# Altium PCB m2t7.PcbDoc (part 2 of 3)
Units mil, origin at the board's own origin, x right, y up, seen from the top; angles counter-clockwise.
Board outline 3925 x 3925 mil, 2 copper layers (TopLayer, BottomLayer); 79 components, 92 nets, 975 pads, 13 vias.
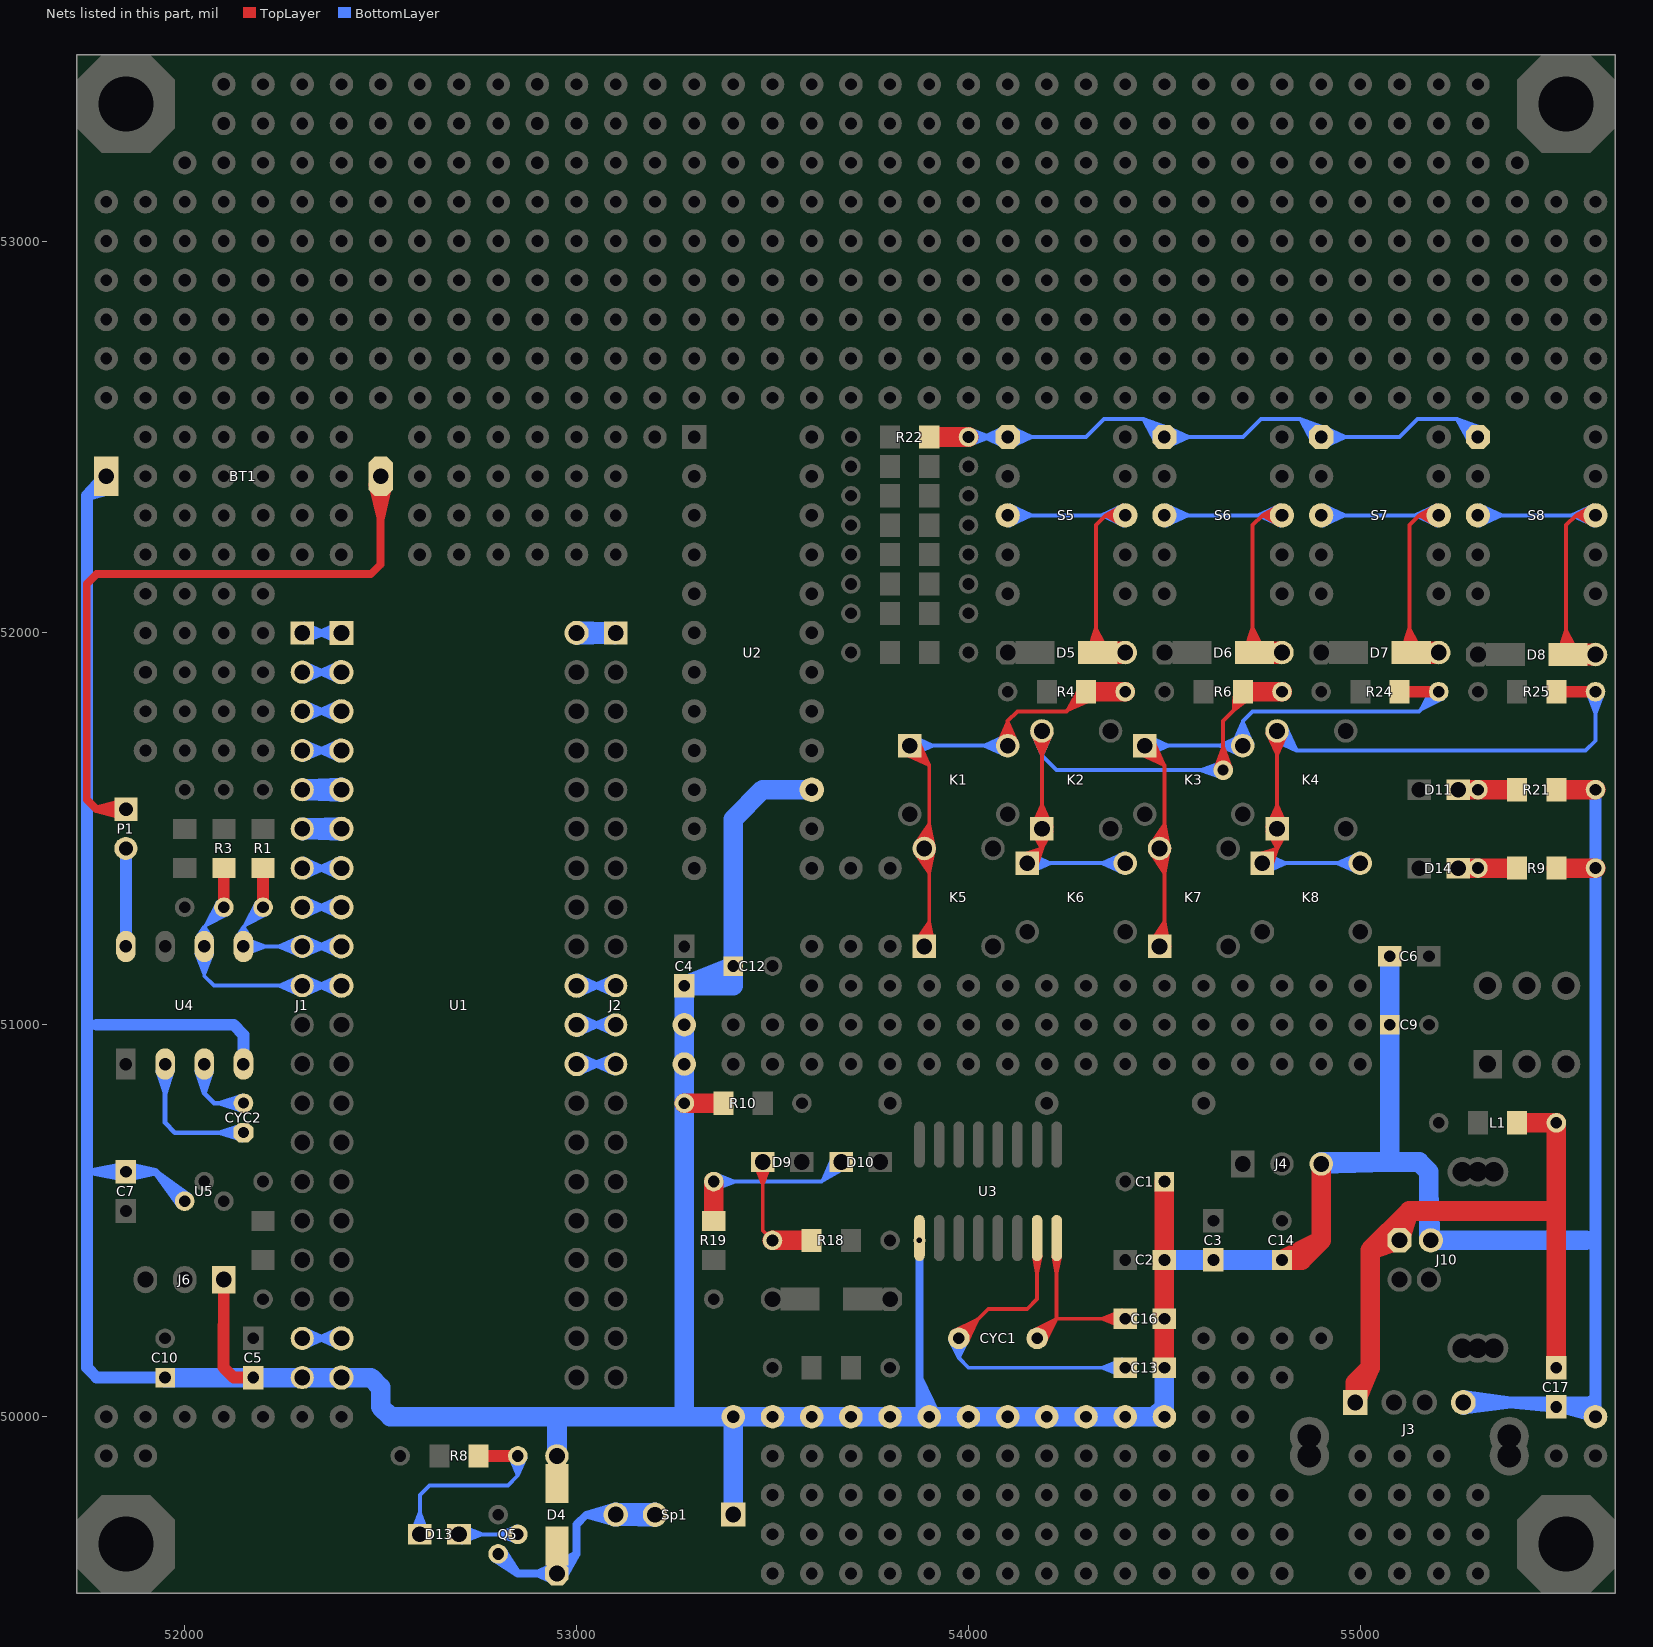
[diagram p2: the nets of this part, all layers, seen from the top]

## Via types
v1: diameter 50, hole 28, TopLayer to BottomLayer, 8 vias
v2: diameter 30, hole 14, TopLayer to BottomLayer, 5 vias

## Nets (pads, with @x,y where several pads share a name; then routed paths per layer and width w, separated by ;. In a path a pad name is that pad's centre, name@x,y a point inside that pad or via, vN(x,y) a via of type N, cw(c..) or ccw(c..) an arc to the next point about the centre after c; other vN are vias at no path point) (continued)
G: R22.2 R22.4 S5.1 S6.1 S7.1 S8.1 | length 4703.3
  TopLayer w50: R22.4@53900,52500 R22.2@54000,52500
  BottomLayer w10: R22.2@54000,52500 S5.1@54100,52500 ; R22.2@54000.91,52490.04 54055,52500 ; R22.2@54000.91,52509.96 54055,52500 ; R22.2@54003.64,52480.33 54055,52500 ; R22.2@54003.64,52519.67 54055,52500 ; S5.1@54092,52500 S5.1@54100,52500 ; S5.1@54094.46,52474.6 54039,52500 ; S5.1@54094.46,52525.4 54039,52500 ; S5.1@54097.9,52484.14 54039,52500 ; S5.1@54097.9,52515.86 54039,52500 ; S5.1@54099.7,52494.01 54039,52500 ; S5.1@54099.7,52505.99 54039,52500 ; S5.1@54100.3,52494.01 54161,52500 ; S5.1@54100.3,52505.99 54161,52500 ; S5.1@54102.1,52484.14 54161,52500 ; S5.1@54102.1,52515.86 54161,52500 ; S5.1@54105.54,52474.6 54161,52500 ; S5.1@54105.54,52525.4 54161,52500 ; S6.1@54479.8,52483.63 54446.02,52545.98 ; S6.1@54488.32,52489.07 54446.02,52545.98 ; S6.1@54495.92,52495.6 54446.02,52545.98 ; S6.1@54500.3,52494.01 54561,52500 ; S6.1@54500.3,52505.99 54561,52500 ; S6.1@54502.1,52484.14 54561,52500 ; S6.1@54502.1,52515.86 54561,52500 ; S6.1@54503.69,52504.73 54446.02,52545.98 ; S6.1@54505.54,52474.6 54561,52500 ; S6.1@54505.54,52525.4 54561,52500 ; S6.1@54508.93,52513.27 54446.02,52545.98 ; S6.1@54512.94,52522.55 54446.02,52545.98 ; S7.1@54879.8,52483.63 54846.02,52545.98 ; S7.1@54888.32,52489.07 54846.02,52545.98 ; S7.1@54895.92,52495.6 54846.02,52545.98 ; S7.1@54900.3,52494.01 54961,52500 ; S7.1@54900.3,52505.99 54961,52500 ; S7.1@54902.1,52484.14 54961,52500 ; S7.1@54902.1,52515.86 54961,52500 ; S7.1@54903.69,52504.73 54846.02,52545.98 ; S7.1@54905.54,52474.6 54961,52500 ; S7.1@54905.54,52525.4 54961,52500 ; S7.1@54908.93,52513.27 54846.02,52545.98 ; S7.1@54912.94,52522.55 54846.02,52545.98 ; S8.1@55279.8,52483.63 55246.02,52545.98 ; S8.1@55288.32,52489.07 55246.02,52545.98 ; S8.1@55295.92,52495.6 55246.02,52545.98 ; S8.1@55303.69,52504.73 55246.02,52545.98 ; S8.1@55308.93,52513.27 55246.02,52545.98 ; S8.1@55312.94,52522.55 55246.02,52545.98 ; S5.1@54100,52500 54300,52500 54346,52546 54446,52546 ; 54446,52546 54492,52500 S6.1@54500,52500 ; 54446.02,52545.98 S6.1@54500,52500 ; S6.1@54500,52500 54700,52500 54746,52546 54750,52546 54846,52546 ; 54846,52546 S7.1@54892,52500 ; 54846.02,52545.98 S7.1@54900,52500 ; S7.1@54892,52500 S7.1@54900,52500 ; S7.1@54892,52500 S7.1@54900,52500 ; S7.1@54900,52500 55100,52500 55146,52546 55150,52546 55246,52546 ; 55246,52546 55292,52500 S8.1@55300,52500 55246.02,52545.98
GND: BT1.1 C1.1 C2.2 C3.2 C4.2 C5.2 C6.2 C7.2 C9.1 C10.1 C12.1 C13.2 C14.1 C16.2 C17.2 D4.2 D4.4 J1.20 J3.4 J4.3 J6.1 J10.4 pad.0@53400,50000 pad.1@54100,50000 pad.6@54500,50000 pad.7@54400,50000 pad.8@54300,50000 pad.9@54200,50000 pad.29@53275,51000 pad.30@53275,50900 pad.32@53500,50000 pad.33@53600,50000 pad.34@53700,50000 pad.35@53800,50000 pad.36@53900,50000 pad.37@54000,50000 pad.45 R9.1 R9.3 R10.2 R10.4 R21.1 R21.3 Sp1.1 U1.20 U2.15 U3.1 U4.4 U5.1 | length 18897.2
  TopLayer w30: 52100,50125 52125,50100 ; C5.2@52150,50100 52125,50100 ; C5.2@52175,50100 52125,50100 ; 52099,50126 J6.1@52100,50350 52099,50126 ; 52099.44,50225 52100,50345 52099.44,50225
  TopLayer w50: R10.2@53275,50800 R10.4@53375,50800 ; C13.2@54500,50125 C16.2@54500,50250 C2.2@54500,50400 C1.1@54500,50600 ; J4.3@54900,50645 54900,50450 ; R9.3@55500,51400 R9.1@55600,51400 ; R21.3@55500,51600 R21.1@55600,51600 ; C14.1@54800,50400 54850,50400 ; C14.1@54800,50400 54900,50450 ; C14.1@54800,50400 54850,50400 ; 54850,50400 54900,50450
  BottomLayer w20: 51751,50625 C7.2@51850,50625 51925,50625 ; C7.2@51848.51,50609.07 51764,50625 C7.2@51848.51,50640.93 ; C7.2@51851.71,50609.09 51925,50625 ; C7.2@51851.71,50640.91 51925,50625 ; U5.1@51988.59,50540.26 51932.57,50617.43 U5.1@52009.74,50561.41 ; U5.1@52000,50550 51925,50625 ; J6.1@52100,50350 J6.1@52100,50375 ; pad.36@53875,50000 v2(53875,50450) ; pad.36@53880.23,49997 53875,50098.01 ; pad.36@53900,50000 53875,50098.01 ; pad.36@53918.8,50006.84 53875,50098.01
  BottomLayer w30: 51751,50625 51751,50675 ; 51775,51000 52125,51000 52150,50975 ; BT1.1@51789.83,52393.35 51751,52351 ; BT1.1@51800,52381 51751,52351 ; BT1.1@51800,52400 51751,52351 ; BT1.1@51806.37,52366.32 51751,52351 ; C10.1@51950,50100 51775,50100 51775,50101 51751,50125 51751,50600 51751,52351 ; U4.4@52150,50900 52150,50975 ; U4.4@52150,50915 52150,50975 ; J3.4@55262.8,50036.42 55586.42,50036.42 ; J3.4@55263.92,50019.96 55384.29,50036.42 J3.4@55263.92,50052.88 ; 55382.08,50036.42 C17.2@55500,50025 ; 55465.27,50036.42 pad.45@55600,50000 ; R21.1@55600,51600 R9.1@55600,51400 55600,50050 ; 55586.42,50036.42 55600,50050 ; 55586.42,50036.42 55500,50029 pad.45@55600,50000 ; 55586.42,50036.42 pad.45@55600,50000 ; 55586.42,50036.42 pad.45@55600,50000 ; 55586.42,50036.42 pad.45@55600,50000 ; pad.45@55600,50000 55600,50050
  BottomLayer w50: C10.1@51950,50100 52150,50100 J1.20@52300,50100 ; 51999,50100 C5.2@52175,50100 J1.20@52300,50100 ; 52875,50000 52950,50000 ; D4.2@52950,49900 52950,50000 ; C4.2@53275,51096 pad.29@53275,51000 ; pad.0@53375,50000 53275,50000 ; Sp1.1@53399.91,49750.33 53400,49931.33 ; Sp1.1@53400,49750.42 pad.0@53400,50000 ; pad.34@53720,50000 pad.36@53900,50000 pad.1@54080,50000 ; pad.8@54300,50000 pad.6@54480,50000 ; pad.8@54320,50000 pad.6@54500,50000 C13.2@54500,50125 54500,50025 54475,50000 pad.1@54100,50000 53875,50000 pad.0@53400,50000 ; C2.2@54500,50400 C3.2@54625,50400 ; C2.2@54504,50400 C3.2@54625,50400 ; C14.1@54800,50400 C3.2@54625,50400 ; C9.1@55075,51000 C6.2@55075,51175 C9.1@55075,51000 55075,50650 ; J10.4@55175,50450 55175,50575 ; 55575,50450 J10.4@55180,50450 55175,50575 ; J1.20@52300,50100 U1.20@52400,50100 52475,50100 52500,50075 52500,50025 52525,50000 52950,50000 ; 52950,50000 53000,50000 53275,50000 ; 53275,50000 pad.30@53275,50900 pad.29@53275,51000 ; 53275,50000 pad.0@53400,50000 ; 53275,50000 pad.0@53400,50000 ; pad.29@53275,51000 C4.2@53275,51100 ; C4.2@53275,51100 53400,51100 ; C4.2@53275,51100 C12.1@53400,51150 ; 53400,51100 C12.1@53400,51150 ; 53400,51100 C12.1@53400,51150 ; C12.1@53400,51150 53400,51525 53475,51600 ; 53475,51600 U2.15@53600,51600 53475,51600 ; 55075,50650 55150,50650 55175,50625 55175,50575 ; 55075,50650 54900,50650 J4.3@54900,50645 55075,50650
NetBT1_2: BT1.2 P1.1 | length 2079.1
  TopLayer w20: P1.1@51847.46,51530.64 51775,51550 ; P1.1@51847.46,51569.36 51775,51550 ; P1.1@51850,51550 51775,51550 ; BT1.2@52479.14,52378.58 52500,52290 ; BT1.2@52500,52381 52500,52290 ; BT1.2@52500,52400 52500,52175 52475,52150 51775,52150 51750,52125 51750,51575 51775,51550 ; BT1.2@52520.86,52378.58 52500,52290
NetC13_1: C13.1 CYC1.2 U3.7 | length 1770.3
  TopLayer w10: CYC1.2@53962.35,50218.36 54024.16,50248.78 ; CYC1.2@53967.45,50209.67 54024.16,50248.78 ; CYC1.2@53975.45,50200.07 54050.38,50275 54150,50275 54175,50300 U3.7@54175,50456 ; CYC1.2@53985.05,50192.07 54024.16,50248.78 ; CYC1.2@53993.74,50186.97 54024.16,50248.78 ; U3.7@54166.54,50409.67 54175,50367 ; U3.7@54175,50410.5 54175,50367 ; U3.7@54183.46,50409.67 54175,50367
  BottomLayer w10: CYC1.2@53953.51,50195.06 53975.45,50149.55 ; CYC1.2@53963.05,50198.52 53975.45,50149.55 ; CYC1.2@53975.45,50200.07 53975.45,50149.55 ; CYC1.2@53987.85,50198.52 53975.45,50149.55 ; CYC1.2@53997.39,50195.06 53975.45,50149.55 ; C13.1@54392.06,50104.37 54340,50125 ; C13.1@54392.06,50145.63 54340,50125 ; C13.1@54394.92,50114.05 54340,50125 ; C13.1@54394.92,50135.95 54340,50125 ; C13.1@54396,50125 54340,50125 ; C13.1@54400,50125 54000,50125 53975.45,50149.55
NetC16_1: C16.1 CYC1.1 U3.8 | length 1205.7
  TopLayer w10: CYC1.1@54162.29,50218.32 54223.87,50248.87 ; CYC1.1@54167.41,50209.64 54223.87,50248.87 ; CYC1.1@54185.09,50192.11 54223.87,50248.87 ; CYC1.1@54193.8,50187.05 54223.87,50248.87 ; U3.8@54216.54,50409.67 54225,50367 ; U3.8@54225,50410.5 54225,50367 ; U3.8@54225,50456 54225,50250 ; U3.8@54233.46,50409.67 54225,50367 ; C16.1@54392.06,50229.37 54340,50250 ; C16.1@54392.06,50270.63 54340,50250 ; C16.1@54394.92,50239.05 54340,50250 ; C16.1@54394.92,50260.95 54340,50250 ; C16.1@54396,50250 54340,50250 ; C16.1@54400,50250 54225,50250 ; 54223.87,50248.87 CYC1.1@54175.45,50200.07 54175.45,50200.45 54225,50250
NetC17_1: C17.1 J3.1 J10.1 L1.1 L1.3 | length 2126.9
  TopLayer w50: L1.3@55400,50750 L1.1@55500,50750 55500,50525 ; C17.1@55500,50125 55500,50525 ; C17.1@55500,50129 55500,50305 ; J3.1@54987.2,50036.42 54987.2,50087.2 ; J3.1@54987.2,50036.42 55025,50125 ; J3.1@54987.2,50036.42 54987.2,50087.2 ; 54987.2,50087.2 55025,50125 ; 55025,50125 55025,50425 ; 55025,50425 55125,50525 ; 55025,50425 J10.1@55100,50450 55125,50525 ; 55125,50525 55500,50525
NetCYC2_1: CYC2.1 U4.2 | length 934
  BottomLayer w12: U4.2@51931.23,50882.04 51950,50824 ; U4.2@51943.01,50884.6 51950,50824 ; U4.2@51950,50875.38 U4.2@51950,50900 51950,50750 51975,50725 CYC2.1@52150,50725 ; U4.2@51950,50885 51950,50824 ; U4.2@51956.99,50884.6 51950,50824 ; U4.2@51968.77,50882.04 51950,50824 ; CYC2.1@52147.04,50706.23 52089,50725 ; CYC2.1@52147.04,50743.77 52089,50725 ; CYC2.1@52149.6,50718.01 52089,50725 ; CYC2.1@52149.6,50731.99 52089,50725
NetCYC2_2: CYC2.2 U4.3 | length 729.4
  BottomLayer w12: U4.3@52031.24,50881.99 52050,50825 ; U4.3@52043.01,50884.59 52050,50825 ; U4.3@52050,50885 52050,50825 ; U4.3@52050,50900 52050,50825 ; U4.3@52056.99,50884.59 52050,50825 ; U4.3@52068.76,50881.99 52050,50825 ; CYC2.2@52147.04,50781.23 52089,50800 ; CYC2.2@52147.04,50818.77 52089,50800 ; CYC2.2@52149.6,50793.01 52089,50800 ; CYC2.2@52149.6,50806.99 52089,50800 ; CYC2.2@52150,50800 52075,50800 52050,50825
NetD4_1: D4.1 D4.3 Q5.3 Sp1.2 Sp1.3 | length 2412.9
  BottomLayer w20: Q5.3@52790.58,49638.33 52850,49600 ; Q5.3@52800,49650 52850,49600 ; Q5.3@52811.67,49659.42 52850,49600 ; D4.1@52938,49616 53000,49650 ; D4.1@52946,49580.4 52900,49600 ; D4.1@52946,49619.6 52900,49600 ; D4.1@52966,49588 53000,49650 ; Sp1.3@53096.88,49771.11 53025,49750 ; Sp1.3@53097.06,49729.53 53025,49750 ; Sp1.3@53102.26,49729.46 Sp1.2@53190.91,49750 ; Sp1.3@53102.41,49771.18 Sp1.2@53190.91,49750 ; Sp1.2@53193.26,49730.11 Sp1.3@53110.27,49769.3 ; Sp1.2@53193.39,49769.93 Sp1.3@53110.19,49731.3 ; Sp1.2@53197.51,49729.15 Sp1.3@53109,49750.3 ; Sp1.2@53197.58,49729.14 53109,49750 Sp1.2@53197.58,49770.86 ; Sp1.2@53197.65,49770.87 Sp1.3@53109,49750.3 ; Sp1.2@53201.9,49729.09 Sp1.3@53110.19,49731.3 ; Sp1.2@53202.04,49770.9 Sp1.3@53110.27,49769.3 ; 52850,49600 52900,49600 ; 52900,49600 D4.1@52950,49600 53000,49650 ; 53000,49650 53000,49725 53025,49750 ; 53025,49750 Sp1.2@53200,49750 ; 53025,49750 Sp1.3@53099.91,49750.33 Sp1.2@53190.91,49750 ; Sp1.3@53109,49750.3 Sp1.2@53200,49750 ; Sp1.3@53110.19,49731.3 Sp1.2@53200,49750 ; Sp1.3@53110.27,49769.3 Sp1.2@53200,49750
NetD5_2: D5.2 D5.4 S5.3 S5.8 | length 3549.8
  TopLayer w10: D5.4@54305.65,51952.92 54325,52011.42 ; D5.4@54315.48,51950.54 54325,52011.42 ; D5.4@54330,51950 54325,52011.42 ; D5.4@54344.17,51926.3 D5.2@54393.75,51925.79 ; D5.4@54344.17,51973.7 D5.2@54393.75,51974.21 ; D5.4@54344.24,51952.88 54325,52011.42 ; D5.4@54345.31,51936.42 D5.2@54393.75,51925.79 ; D5.4@54345.31,51963.58 D5.2@54393.75,51974.21 ; D5.4@54348.2,51935.65 D5.2@54397.75,51935.17 ; D5.4@54348.2,51964.35 D5.2@54397.75,51964.83 ; D5.4@54349.15,51925.51 D5.2@54397.75,51935.17 ; D5.4@54349.15,51974.49 D5.2@54397.75,51964.83 ; D5.4@54352.6,51935.63 D5.2@54400,51950 ; D5.4@54352.6,51964.37 D5.2@54400,51950 ; D5.4@54353.56,51956.82 54325,52011.42 ; D5.4@54356.55,51926.24 D5.2@54400,51950 ; D5.4@54356.55,51973.76 D5.2@54400,51950 ; D5.4@54356.81,51936.93 D5.2@54397.75,51964.83 ; D5.4@54356.81,51963.07 D5.2@54397.75,51935.17 ; D5.4@54359.34,51938.5 D5.2@54393.75,51974.21 ; D5.4@54359.34,51961.5 D5.2@54393.75,51925.79 ; D5.4@54363.38,51929.14 D5.2@54397.75,51964.83 ; D5.4@54363.38,51970.86 D5.2@54397.75,51935.17 ; D5.4@54367.37,51932.22 D5.2@54393.75,51974.21 ; D5.4@54367.37,51967.78 D5.2@54393.75,51925.79 ; S5.8@54393.24,52274.89 54350,52300 ; S5.8@54393.24,52325.11 54350,52300 ; S5.8@54397.44,52284.21 54350,52300 ; S5.8@54397.44,52315.79 54350,52300 ; S5.8@54399.64,52294.01 54350,52300 ; S5.8@54399.64,52305.99 54350,52300 ; S5.8@54400,52300 54350,52300 ; D5.4@54350,51950 54325,51975 54325,52275 54350,52300 ; D5.4@54350,51950 D5.2@54400,51950 ; D5.4@54350,51950 D5.2@54393.75,51925.79 ; D5.4@54350,51950 D5.2@54393.75,51974.21 ; D5.4@54350,51950 D5.2@54397.75,51935.17 ; D5.4@54350,51950 D5.2@54397.75,51964.83 ; D5.4@54350.47,51950 D5.2@54393.75,51925.79 ; D5.4@54350.47,51950 D5.2@54393.75,51974.21 ; D5.4@54350.47,51950 D5.2@54400,51950 ; D5.4@54350.47,51950 D5.2@54397.75,51935.17 ; D5.4@54350.47,51950 D5.2@54397.75,51964.83
  BottomLayer w10: S5.3@54100,52300 S5.8@54400,52300 ; S5.3@54100.3,52294.01 54161,52300 ; S5.3@54100.3,52305.99 54161,52300 ; S5.3@54102.1,52284.14 54161,52300 ; S5.3@54102.1,52315.86 54161,52300 ; S5.3@54105.54,52274.6 54161,52300 ; S5.3@54105.54,52325.4 54161,52300 ; S5.8@54394.46,52274.6 54339,52300 ; S5.8@54394.46,52325.4 54339,52300 ; S5.8@54397.9,52284.14 54339,52300 ; S5.8@54397.9,52315.86 54339,52300 ; S5.8@54399.7,52294.01 54339,52300 ; S5.8@54399.7,52305.99 54339,52300
NetD6_2: D6.2 D6.4 S6.3 S6.8 | length 3549.8
  TopLayer w10: D6.4@54705.65,51952.92 54725,52011.42 ; D6.4@54715.48,51950.54 54725,52011.42 ; D6.4@54730,51950 54725,52011.42 ; D6.4@54744.17,51926.3 D6.2@54793.75,51925.79 ; D6.4@54744.17,51973.7 D6.2@54793.75,51974.21 ; D6.4@54744.24,51952.88 54725,52011.42 ; D6.4@54745.31,51936.42 D6.2@54793.75,51925.79 ; D6.4@54745.31,51963.58 D6.2@54793.75,51974.21 ; D6.4@54748.2,51935.65 D6.2@54797.75,51935.17 ; D6.4@54748.2,51964.35 D6.2@54797.75,51964.83 ; D6.4@54749.15,51925.51 D6.2@54797.75,51935.17 ; D6.4@54749.15,51974.49 D6.2@54797.75,51964.83 ; D6.4@54752.6,51935.63 D6.2@54800,51950 ; D6.4@54752.6,51964.37 D6.2@54800,51950 ; D6.4@54753.56,51956.82 54725,52011.42 ; D6.4@54756.55,51926.24 D6.2@54800,51950 ; D6.4@54756.55,51973.76 D6.2@54800,51950 ; D6.4@54756.81,51936.93 D6.2@54797.75,51964.83 ; D6.4@54756.81,51963.07 D6.2@54797.75,51935.17 ; D6.4@54759.34,51938.5 D6.2@54793.75,51974.21 ; D6.4@54759.34,51961.5 D6.2@54793.75,51925.79 ; D6.4@54763.38,51929.14 D6.2@54797.75,51964.83 ; D6.4@54763.38,51970.86 D6.2@54797.75,51935.17 ; D6.4@54767.37,51932.22 D6.2@54793.75,51974.21 ; D6.4@54767.37,51967.78 D6.2@54793.75,51925.79 ; S6.8@54793.24,52274.89 54750,52300 ; S6.8@54793.24,52325.11 54750,52300 ; S6.8@54797.44,52284.21 54750,52300 ; S6.8@54797.44,52315.79 54750,52300 ; S6.8@54799.64,52294.01 54750,52300 ; S6.8@54799.64,52305.99 54750,52300 ; S6.8@54800,52300 54750,52300 ; D6.4@54750,51950 54725,51975 54725,52275 54750,52300 ; D6.4@54750,51950 D6.2@54800,51950 ; D6.4@54750,51950 D6.2@54793.75,51925.79 ; D6.4@54750,51950 D6.2@54793.75,51974.21 ; D6.4@54750,51950 D6.2@54797.75,51935.17 ; D6.4@54750,51950 D6.2@54797.75,51964.83 ; D6.4@54750.47,51950 D6.2@54793.75,51925.79 ; D6.4@54750.47,51950 D6.2@54793.75,51974.21 ; D6.4@54750.47,51950 D6.2@54800,51950 ; D6.4@54750.47,51950 D6.2@54797.75,51935.17 ; D6.4@54750.47,51950 D6.2@54797.75,51964.83
  BottomLayer w10: S6.3@54500,52300 S6.8@54800,52300 ; S6.3@54500.3,52294.01 54561,52300 ; S6.3@54500.3,52305.99 54561,52300 ; S6.3@54502.1,52284.14 54561,52300 ; S6.3@54502.1,52315.86 54561,52300 ; S6.3@54505.54,52274.6 54561,52300 ; S6.3@54505.54,52325.4 54561,52300 ; S6.8@54794.46,52274.6 54739,52300 ; S6.8@54794.46,52325.4 54739,52300 ; S6.8@54797.9,52284.14 54739,52300 ; S6.8@54797.9,52315.86 54739,52300 ; S6.8@54799.7,52294.01 54739,52300 ; S6.8@54799.7,52305.99 54739,52300
NetD7_2: D7.2 D7.4 S7.3 S7.8 | length 4581.8
  TopLayer w10: D7.4@55105.65,51952.92 55125,52011.42 ; D7.4@55115.48,51950.54 55125,52011.42 ; D7.4@55130,51950 55125,52011.42 ; D7.4@55144.17,51926.3 D7.2@55193.75,51925.79 ; D7.4@55144.17,51973.7 D7.2@55193.75,51974.21 ; D7.4@55144.24,51952.88 55125,52011.42 ; D7.4@55145.31,51936.42 D7.2@55193.75,51925.79 ; D7.4@55145.31,51963.58 D7.2@55193.75,51974.21 ; D7.4@55148.2,51935.65 D7.2@55197.75,51935.17 ; D7.4@55148.2,51964.35 D7.2@55197.75,51964.83 ; D7.4@55149.15,51925.51 D7.2@55197.75,51935.17 ; D7.4@55149.15,51974.49 D7.2@55197.75,51964.83 ; D7.4@55152.6,51935.63 D7.2@55200,51950 ; D7.4@55152.6,51964.37 D7.2@55200,51950 ; D7.4@55153.56,51956.82 55125,52011.42 ; D7.4@55156.55,51926.24 D7.2@55200,51950 ; D7.4@55156.55,51973.76 D7.2@55200,51950 ; D7.4@55156.81,51936.93 D7.2@55197.75,51964.83 ; D7.4@55156.81,51963.07 D7.2@55197.75,51935.17 ; D7.4@55159.34,51938.5 D7.2@55193.75,51974.21 ; D7.4@55159.34,51961.5 D7.2@55193.75,51925.79 ; D7.4@55163.38,51929.14 D7.2@55197.75,51964.83 ; D7.4@55163.38,51970.86 D7.2@55197.75,51935.17 ; D7.4@55167.37,51932.22 D7.2@55193.75,51974.21 ; D7.4@55167.37,51967.78 D7.2@55193.75,51925.79 ; S7.8@55193.24,52274.89 55150,52300 ; S7.8@55193.24,52325.11 55150,52300 ; S7.8@55197.44,52284.21 55150,52300 ; S7.8@55197.44,52315.79 55150,52300 ; S7.8@55199.64,52294.01 55150,52300 ; S7.8@55199.64,52305.99 55150,52300 ; S7.8@55200,52300 55150,52300 ; D7.4@55150,51950 55125,51975 55125,52275 55150,52300 ; D7.4@55150,51950 D7.2@55200,51950 ; D7.4@55150,51950 D7.2@55193.75,51925.79 ; D7.4@55150,51950 D7.2@55193.75,51974.21 ; D7.4@55150,51950 D7.2@55197.75,51935.17 ; D7.4@55150,51950 D7.2@55197.75,51964.83 ; D7.4@55150.47,51950 D7.2@55193.75,51925.79 ; D7.4@55150.47,51950 D7.2@55193.75,51974.21 ; D7.4@55150.47,51950 D7.2@55200,51950 ; D7.4@55150.47,51950 D7.2@55197.75,51935.17 ; D7.4@55150.47,51950 D7.2@55197.75,51964.83
  BottomLayer w10: 54961,52300 54905.54,52325.4 54961,52300 ; 54961,52300 54905.54,52274.6 54961,52300 ; 54961,52300 54902.1,52315.86 54961,52300 ; 54961,52300 54902.1,52284.14 54961,52300 ; 54961,52300 54900.3,52305.99 54961,52300 ; 54961,52300 54900.3,52294.01 54961,52300 ; 55139,52300 55194.46,52274.6 55139,52300 ; 55139,52300 55194.46,52325.4 55139,52300 ; 55139,52300 55197.9,52284.14 55139,52300 ; 55139,52300 55197.9,52315.86 55139,52300 ; 55139,52300 55199.7,52294.01 55139,52300 ; 55139,52300 55199.7,52305.99 55139,52300 ; S7.3@54900,52300 S7.8@55200,52300 S7.3@54900,52300
NetD8_2: D8.2 D8.4 S8.3 S8.8 | length 4146.5
  TopLayer w10: D8.4@55505.66,51947.99 55525,52004.88 ; D8.4@55515.48,51945.55 55525,52004.88 ; D8.4@55544.22,51921.28 D8.2@55591.4,51921.52 ; D8.4@55544.22,51947.95 55525,52004.88 ; D8.4@55544.23,51968.72 D8.2@55596.22,51969.71 ; D8.4@55545.27,51931.44 D8.2@55591.4,51921.52 ; D8.4@55545.42,51958.62 D8.2@55596.22,51969.71 ; D8.4@55548.22,51930.65 D8.2@55596.3,51930.46 ; D8.4@55548.23,51959.35 D8.2@55599.25,51959.98 ; D8.4@55549.12,51969.49 D8.2@55599.25,51959.98 ; D8.4@55549.27,51920.5 D8.2@55596.3,51930.46 ; D8.4@55551.14,51959.51 D8.2@55600,51950 ; D8.4@55552.6,51930.63 D8.2@55600,51945 ; D8.4@55552.6,51959.37 D8.2@55600,51945 ; D8.4@55553.51,51951.99 55525,52004.88 ; D8.4@55554.03,51930.91 D8.2@55600,51950 ; D8.4@55554.1,51969.26 D8.2@55600,51950 ; D8.4@55556.55,51921.24 D8.2@55600,51945 ; D8.4@55556.55,51968.76 D8.2@55600,51945 ; D8.4@55556.67,51931.86 D8.2@55599.25,51959.98 ; D8.4@55556.91,51958.02 D8.2@55596.3,51930.46 ; D8.4@55558.87,51921.96 D8.2@55600,51950 ; D8.4@55559.09,51933.31 D8.2@55596.22,51969.71 ; D8.4@55559.55,51956.34 D8.2@55591.4,51921.52 ; D8.4@55563.1,51923.97 D8.2@55599.25,51959.98 ; D8.4@55563.61,51965.71 D8.2@55596.3,51930.46 ; D8.4@55566.89,51926.78 D8.2@55596.22,51969.71 ; D8.4@55567.79,51962.37 D8.2@55591.4,51921.52 ; S8.8@55593.24,52274.89 55550,52300 ; S8.8@55593.24,52325.11 55550,52300 ; S8.8@55597.44,52284.21 55550,52300 ; S8.8@55597.44,52315.79 55550,52300 ; S8.8@55599.64,52294.01 55550,52300 ; S8.8@55599.64,52305.99 55550,52300 ; S8.8@55600,52300 55550,52300 ; 55525,51975 D8.4@55550,51950 ; 55525,51975 55525,52275 55550,52300 ; 55525,51975 55506.23,51951.07 55525,51975 ; 55525,51975 55550.51,51958.45 55525,51975 ; 55525,51975 55515.51,51946.1 55525,51975 ; 55525,51975 55543.34,51950.74 55525,51975 ; 55525,51975 D8.4@55530,51945 ; 55525,51975 D8.4@55530,51945 ; 55525,52004.88 D8.4@55530,51945 ; D8.4@55550,51950 D8.2@55600,51950 ; D8.4@55550,51950 D8.2@55591.4,51921.52 ; D8.4@55550,51950 D8.2@55596.22,51969.71 ; D8.4@55550,51950 D8.2@55596.3,51930.46 ; D8.4@55550,51950 D8.2@55599.25,51959.98 ; D8.4@55550,51950 D8.2@55600,51945 ; D8.4@55550.47,51945 D8.2@55591.4,51921.52 ; D8.4@55550.47,51945 D8.2@55600,51950 ; D8.4@55550.47,51945 D8.2@55596.22,51969.71 ; D8.4@55550.47,51945 D8.2@55596.3,51930.46 ; D8.4@55550.47,51945 D8.2@55599.25,51959.98 ; D8.4@55550.47,51945 D8.2@55600,51945
  BottomLayer w10: S8.3@55300,52300 S8.8@55600,52300 ; S8.3@55300.3,52294.01 55361,52300 ; S8.3@55300.3,52305.99 55361,52300 ; S8.3@55302.1,52284.14 55361,52300 ; S8.3@55302.1,52315.86 55361,52300 ; S8.3@55305.54,52274.6 55361,52300 ; S8.3@55305.54,52325.4 55361,52300 ; S8.8@55594.46,52274.6 55539,52300 ; S8.8@55594.46,52325.4 55539,52300 ; S8.8@55597.9,52284.14 55539,52300 ; S8.8@55597.9,52315.86 55539,52300 ; S8.8@55599.7,52294.01 55539,52300 ; S8.8@55599.7,52305.99 55539,52300
NetD9_2: D9.2 R18.2 R18.4 | length 534.4
  TopLayer w10: D9.2@53454.37,50646.06 53475,50594 ; D9.2@53464.05,50648.92 53475,50594 ; D9.2@53475,50650 53475,50475 R18.2@53500,50450 ; D9.2@53485.95,50648.92 53475,50594 ; D9.2@53495.63,50646.06 53475,50594
  TopLayer w50: R18.2@53500,50450 R18.4@53600,50450
NetD10_2: D10.2 R19.2 R19.4 | length 985.7
  TopLayer w50: R19.4@53350,50500 R19.2@53350,50600
  BottomLayer w10: R19.2@53350,50600 53625,50600 D10.2@53675,50650 ; R19.2@53350.91,50590.04 53405,50600 ; R19.2@53350.91,50609.96 53405,50600 ; R19.2@53353.64,50580.33 53405,50600 ; R19.2@53353.64,50619.67 53405,50600 ; D10.2@53653.39,50661.45 53627.79,50602.79 ; D10.2@53662.28,50656.7 53627.79,50602.79 ; D10.2@53671,50650 53627.79,50602.79 ; D10.2@53678.45,50641.9 53627.79,50602.79 ; D10.2@53683.96,50633.47 53627.79,50602.79
NetD11_2: D11.2 R21.2 R21.4 | length 388
  TopLayer w30: D11.2@55250,51600 R21.2@55300,51600 D11.2@55254,51600
  TopLayer w50: D11.2@55254,51600 R21.4@55400,51600 R21.2@55300,51600 D11.2@55254,51600
NetD13_1: D13.1 Q5.2 | length 650
  BottomLayer w10: D13.1@52700,49700 Q5.2@52850,49700 ; D13.1@52704,49700 52760,49700 ; D13.1@52705.08,49689.05 52760,49700 ; D13.1@52705.08,49710.95 52760,49700 ; D13.1@52707.94,49679.37 52760,49700 ; D13.1@52707.94,49720.63 52760,49700 ; Q5.2@52846.36,49680.33 52795,49700 ; Q5.2@52846.36,49719.67 52795,49700 ; Q5.2@52849.09,49690.04 52795,49700 ; Q5.2@52849.09,49709.96 52795,49700
NetD13_2: D13.2 R8.1 R8.3 | length 944.7
  TopLayer w30: R8.3@52750,49900 R8.1@52850,49900
  BottomLayer w10: D13.2@52579.37,49703.94 52600,49756 ; D13.2@52589.05,49701.08 52600,49756 ; D13.2@52600,49700 52600,49800 52625,49825 52825,49825 52850,49850 ; D13.2@52610.95,49701.08 52600,49756 ; D13.2@52620.63,49703.94 52600,49756 ; R8.1@52830.4,49896 52850,49850 ; R8.1@52840.05,49899 52850,49850 ; R8.1@52850,49900 52850,49850 ; R8.1@52859.95,49899 52850,49850 ; R8.1@52869.6,49896 52850,49850
NetD14_2: D14.2 R9.2 R9.4 | length 3374
  TopLayer w50: D14.2@55254,51400 R9.4@55400,51400 R9.2@55300,51400 D14.2@55254,51400
  BottomLayer w10: R9.2@55287.37,51415.51 D14.2@55259.18,51379.65 ; R9.2@55287.47,51384.42 D14.2@55258.55,51420.5 ; R9.2@55287.43,51384.44 D14.2@55258.79,51420.45 ; R9.2@55287.43,51415.56 D14.2@55258.79,51379.55 ; R9.2@55291.12,51417.92 D14.2@55255.5,51389.1 ; R9.2@55291.14,51417.93 D14.2@55255.32,51389.08 ; R9.2@55294.62,51391.57 D14.2@55258.55,51420.5 ; R9.2@55294.61,51391.58 D14.2@55258.79,51420.45 ; R9.2@55295.81,51380.44 D14.2@55249,51400.69 ; R9.2@55296,51380.4 D14.2@55250,51400 ; R9.2@55296,51419.6 D14.2@55250,51400 ; R9.2@55296.34,51419.66 D14.2@55249,51400.69 ; R9.2@55299,51390.05 D14.2@55250,51400 ; R9.2@55299,51409.95 D14.2@55250,51400 ; R9.2@55299.15,51409.96 D14.2@55249,51400.69 ; D14.2@55249,51400.69 R9.2@55299.31,51400.69 ; D14.2@55249,51400.69 R9.2@55298.89,51390.06 ; D14.2@55249,51400.69 R9.2@55300,51400 ; D14.2@55250,51400 R9.2@55300,51400 ; D14.2@55254,51400 R9.2@55300,51400 ; D14.2@55254,51400 R9.2@55299.31,51400.69 ; D14.2@55254,51400 55295.65,51380.48 D14.2@55254,51400 ; D14.2@55254,51400 55295.65,51419.52 D14.2@55254,51400 ; D14.2@55254,51400 R9.2@55298.91,51390.06 ; D14.2@55254,51400 55298.91,51409.94 D14.2@55254,51400 ; D14.2@55254,51400 R9.2@55298.91,51390.06 ; D14.2@55254,51400 R9.2@55300,51400 ; D14.2@55255.17,51410.94 R9.2@55299.31,51400.69 ; D14.2@55255.17,51410.94 55291.16,51382.06 D14.2@55255.32,51410.92 ; D14.2@55255.17,51410.94 55300.42,51420 D14.2@55255.32,51410.92 ; D14.2@55255.17,51410.94 55296.59,51390.6 D14.2@55255.32,51410.92 ; D14.2@55255.17,51410.94 55301.3,51409.91 D14.2@55255.32,51410.92 ; D14.2@55255.17,51410.94 R9.2@55300,51400 ; D14.2@55255.32,51389.08 R9.2@55300,51400 ; D14.2@55255.32,51389.08 55300.41,51380 D14.2@55255.5,51389.1 ; D14.2@55255.32,51389.08 55301.3,51390.09 D14.2@55255.5,51389.1 ; D14.2@55255.32,51389.08 55296.58,51409.4 D14.2@55255.5,51389.1 ; D14.2@55255.32,51410.92 R9.2@55300,51400 ; D14.2@55255.5,51389.1 R9.2@55299.31,51400.69 ; D14.2@55255.5,51389.1 R9.2@55300,51400 ; D14.2@55258.55,51420.5 R9.2@55299.31,51400.69 ; D14.2@55258.55,51420.5 55304.78,51419.42 D14.2@55258.79,51420.45 ; D14.2@55258.55,51420.5 55303.44,51409.39 D14.2@55258.79,51420.45 ; D14.2@55258.55,51420.5 R9.2@55300,51400 ; D14.2@55258.79,51379.55 R9.2@55300,51400 ; D14.2@55258.79,51379.55 55304.78,51380.58 D14.2@55259.18,51379.65 ; D14.2@55258.79,51379.55 55303.44,51390.61 D14.2@55259.18,51379.65 ; D14.2@55258.79,51379.55 55294.61,51408.42 D14.2@55259.18,51379.65 ; D14.2@55258.79,51420.45 R9.2@55300,51400 ; D14.2@55259.18,51379.65 R9.2@55299.31,51400.69 ; D14.2@55259.18,51379.65 R9.2@55300,51400 ; R9.2@55299.31,51400.69 R9.2@55300,51400
NetJ1_19: J1.19 U1.19 | length 704.1
  BottomLayer w10: J1.19@52300,50200 U1.19@52400,50200 ; J1.19@52301.77,50185.58 52359.53,50200 ; J1.19@52301.77,50214.42 52359.53,50200 ; J1.19@52305.05,50176 52359.53,50200 ; J1.19@52305.05,50224 52359.53,50200 ; U1.19@52394.46,50174.6 52339,50200 ; U1.19@52394.46,50225.4 52339,50200 ; U1.19@52397.9,50184.14 52339,50200 ; U1.19@52397.9,50215.86 52339,50200 ; U1.19@52399.7,50194.01 52339,50200 ; U1.19@52399.7,50205.99 52339,50200
NetJ2_1: J2.1 U1.40 | length 1011.1
  BottomLayer w20: U1.40@52998.34,51979.07 J2.1@53089.96,51982.35 ; U1.40@52998.34,52020.93 J2.1@53089.96,52017.65 ; U1.40@53002.42,51979.14 53091,52000 U1.40@53002.42,52020.86 ; U1.40@53006.38,51979.99 J2.1@53089.96,52017.65 ; U1.40@53006.38,52020.01 J2.1@53089.96,51982.35 ; J2.1@53097.87,51980.59 53010.47,52000 J2.1@53097.87,52019.41 ; J2.1@53100,52000 U1.40@53000,52000 ; U1.40@53000,52000 J2.1@53089.96,51982.35 ; U1.40@53000,52000 J2.1@53089.96,52017.65
NetJ2_10: J2.10 U1.31 | length 704.1
  BottomLayer w10: U1.31@53000,51100 J2.10@53100,51100 ; U1.31@53000.3,51094.01 53061,51100 ; U1.31@53000.3,51105.99 53061,51100 ; U1.31@53002.1,51084.14 53061,51100 ; U1.31@53002.1,51115.86 53061,51100 ; U1.31@53005.54,51074.6 53061,51100 ; U1.31@53005.54,51125.4 53061,51100 ; J2.10@53094.95,51076 53040.47,51100 ; J2.10@53094.95,51124 53040.47,51100 ; J2.10@53098.23,51085.58 53040.47,51100 ; J2.10@53098.23,51114.42 53040.47,51100
NetJ2_11: J2.11 U1.30 | length 704.1
  BottomLayer w10: U1.30@53000,51000 J2.11@53100,51000 ; U1.30@53000.3,50994.01 53061,51000 ; U1.30@53000.3,51005.99 53061,51000 ; U1.30@53002.1,50984.14 53061,51000 ; U1.30@53002.1,51015.86 53061,51000 ; U1.30@53005.54,50974.6 53061,51000 ; U1.30@53005.54,51025.4 53061,51000 ; J2.11@53094.95,50976 53040.47,51000 ; J2.11@53094.95,51024 53040.47,51000 ; J2.11@53098.23,50985.58 53040.47,51000 ; J2.11@53098.23,51014.42 53040.47,51000
NetJ2_12: J2.12 U1.29 | length 704.1
  BottomLayer w10: U1.29@53000,50900 J2.12@53100,50900 ; U1.29@53000.3,50894.01 53061,50900 ; U1.29@53000.3,50905.99 53061,50900 ; U1.29@53002.1,50884.14 53061,50900 ; U1.29@53002.1,50915.86 53061,50900 ; U1.29@53005.54,50874.6 53061,50900 ; U1.29@53005.54,50925.4 53061,50900 ; J2.12@53094.95,50876 53040.47,50900 ; J2.12@53094.95,50924 53040.47,50900 ; J2.12@53098.23,50885.58 53040.47,50900 ; J2.12@53098.23,50914.42 53040.47,50900
NetK1_1: K1.1 K1.4 K5.1 K5.4 R4.2 R4.4 | length 3445.7
  TopLayer w10: K1.1@53835.73,51691.98 53900,51662.5 ; K1.1@53840.58,51700.83 53900,51662.5 ; K1.1@53850,51712.5 53900,51662.5 ; K1.1@53861.67,51721.92 53900,51662.5 ; K5.1@53864.44,51209.66 53900,51262.2 ; K5.4@53864.46,51440.31 53900,51388.05 ; K5.4@53864.46,51459.71 53900,51511.86 ; K1.1@53870.52,51726.77 53900,51662.5 ; K5.1@53873.25,51204.67 53900,51262.2 ; K5.4@53873.25,51445.31 53900,51388.05 ; K5.4@53873.25,51454.7 53900,51511.86 ; K5.1@53887.5,51200 53900,51262.2 ; K5.1@53900,51200 53900,51662.5 ; K5.1@53902.45,51198.8 53900,51262.2 ; K5.4@53902.45,51448.8 53900,51511.86 ; K5.4@53902.45,51451.2 53900,51388.05 ; K5.1@53912.5,51200 53900,51262.2 ; K1.4@54075.55,51717.71 54100,51772.5 ; K1.4@54085.12,51714.38 54100,51772.5 ; K1.4@54100,51712.5 54100,51775 54125,51800 54250,51800 R4.4@54300,51850 ; K1.4@54114.88,51714.38 54100,51772.5 ; K1.4@54124.45,51717.71 54100,51772.5 ; R4.4@54283.81,51858.79 54253.2,51803.2 ; R4.4@54292.22,51853.25 54253.2,51803.2 ; R4.4@54300,51846.06 54253.2,51803.2 ; R4.4@54306.48,51837.68 54253.2,51803.2 ; R4.4@54311.26,51828.82 54253.2,51803.2 ; 53900,51388.05 53912.5,51450 53900,51511.86 ; 53900,51388.05 K5.4@53887.5,51450 53900,51511.86
  TopLayer w50: R4.4@54300,51850 R4.2@54400,51850
  BottomLayer w10: K1.1@53850,51712.5 K1.4@54100,51712.5 ; K1.1@53851.88,51697.62 53910,51712.5 ; K1.1@53851.88,51727.38 53910,51712.5 ; K1.1@53855.21,51688.05 53910,51712.5 ; K1.1@53855.21,51736.95 53910,51712.5 ; K1.4@54094.79,51688.05 54040,51712.5 ; K1.4@54094.79,51736.95 54040,51712.5 ; K1.4@54098.12,51697.62 54040,51712.5 ; K1.4@54098.12,51727.38 54040,51712.5
NetK2_1: K2.1 K2.4 K6.1 K6.4 R6.2 R6.4 | length 3790
  TopLayer w10: K6.1@54136.99,51433.85 54187.5,51450 ; K6.1@54141,51424.5 54187.5,51450 ; K6.1@54150,51412.5 54187.5,51450 ; K6.1@54162,51403.5 54187.5,51450 ; K2.1@54163.05,51505.21 54187.5,51560 ; K2.4@54163.05,51744.79 54187.5,51690 ; K2.1@54163.29,51493.75 54187.5,51450 ; K6.1@54171.35,51399.49 54187.5,51450 ; K2.1@54172.62,51501.88 54187.5,51560 ; K2.4@54172.62,51748.12 54187.5,51690 ; K2.1@54172.67,51497.75 54187.5,51450 ; K2.4@54187.5,51750 K2.1@54187.5,51500 54187.5,51450 ; K2.1@54202.33,51497.75 54187.5,51450 ; K2.1@54202.38,51501.88 54187.5,51560 ; K2.4@54202.38,51748.12 54187.5,51690 ; K2.1@54211.71,51493.75 54187.5,51450 ; K2.1@54211.95,51505.21 54187.5,51560 ; K2.4@54211.95,51744.79 54187.5,51690 ; v1@54630.29,51653.39 54650,51709 ; v1@54640.04,51650.85 54650,51709 ; v1(54650,51650) 54650,51775 54678.02,51803.02 ; v1@54659.96,51650.85 54650,51709 ; v1@54669.71,51653.39 54650,51709 ; R6.4@54680.09,51851.31 54678.02,51803.02 ; R6.4@54690.1,51849.82 54678.02,51803.02 ; R6.4@54700,51846.06 54678.02,51803.02 ; R6.4@54700,51850 54678.02,51828.02 54678.02,51803.02 ; R6.4@54708.85,51840.24 54678.02,51803.02 ; R6.4@54715.92,51833.01 54678.02,51803.02
  TopLayer w50: R6.4@54700,51850 R6.2@54800,51850
  BottomLayer w10: K6.1@54150,51412.5 K6.4@54400,51412.5 ; K6.1@54151.88,51397.62 54210,51412.5 ; K6.1@54151.88,51427.38 54210,51412.5 ; K6.1@54155.21,51388.05 54210,51412.5 ; K6.1@54155.21,51436.95 54210,51412.5 ; K2.4@54163.05,51744.79 54187.5,51690 ; K2.4@54172.62,51748.12 54187.5,51690 ; K2.4@54187.5,51750 54187.5,51687.5 54225,51650 v1(54650,51650) ; K2.4@54202.38,51748.12 54187.5,51690 ; K2.4@54211.95,51744.79 54187.5,51690 ; K6.4@54394.79,51388.05 54340,51412.5 ; K6.4@54394.79,51436.95 54340,51412.5 ; K6.4@54398.12,51397.62 54340,51412.5 ; K6.4@54398.12,51427.38 54340,51412.5 ; v1@54646.61,51630.29 54591,51650 ; v1@54646.61,51669.71 54591,51650 ; v1@54649.15,51640.04 54591,51650 ; v1@54649.15,51659.96 54591,51650
NetK3_1: K3.1 K3.4 K7.1 K7.4 R24.2 R24.4 | length 3689.8
  TopLayer w10: K3.1@54435.73,51691.98 54500,51662.5 ; K3.1@54440.58,51700.83 54500,51662.5 ; K3.1@54450,51712.5 54500,51662.5 ; K3.1@54461.67,51721.92 54500,51662.5 ; K7.1@54464.44,51209.66 54500,51262.2 ; K7.4@54464.46,51440.31 54500,51388.05 ; K7.4@54464.46,51459.71 54500,51511.86 ; K3.1@54470.52,51726.77 54500,51662.5 ; K7.1@54473.25,51204.67 54500,51262.2 ; K7.4@54473.25,51445.31 54500,51388.05 ; K7.4@54473.25,51454.7 54500,51511.86 ; K7.1@54487.5,51200 54500,51262.2 ; K7.1@54500,51200 54500,51662.5 ; K7.1@54502.45,51198.8 54500,51262.2 ; K7.4@54502.45,51448.8 54500,51511.86 ; K7.4@54502.45,51451.2 54500,51388.05 ; K7.1@54512.5,51200 54500,51262.2 ; 54500,51388.05 54512.5,51450 54500,51511.86 ; 54500,51388.05 K7.4@54487.5,51450 54500,51511.86
  TopLayer w30: R24.4@55100,51850 R24.2@55200,51850
  BottomLayer w10: K3.1@54450,51712.5 K3.4@54700,51712.5 54700,51775 54725,51800 55150,51800 R24.2@55200,51850 ; K3.1@54451.88,51697.62 54510,51712.5 ; K3.1@54451.88,51727.38 54510,51712.5 ; K3.1@54455.21,51688.05 54510,51712.5 ; K3.1@54455.21,51736.95 54510,51712.5 ; K3.4@54675.55,51717.71 54700,51772.5 ; K3.4@54685.12,51714.38 54700,51772.5 ; K3.4@54694.79,51688.05 54640,51712.5 ; K3.4@54694.79,51736.95 54640,51712.5 ; K3.4@54698.12,51697.62 54640,51712.5 ; K3.4@54698.12,51727.38 54640,51712.5 ; K3.4@54714.88,51714.38 54700,51772.5 ; K3.4@54724.45,51717.71 54700,51772.5 ; R24.2@55183.86,51861.81 55153.79,51803.79 ; R24.2@55192.41,51856.51 55153.79,51803.79 ; R24.2@55206.51,51842.41 55153.79,51803.79 ; R24.2@55211.81,51833.86 55153.79,51803.79
NetK4_1: K4.1 K4.4 K8.1 K8.4 R25.2 R25.4 | length 3546.6
  TopLayer w10: K8.1@54736.99,51433.85 54787.5,51450 ; K8.1@54741,51424.5 54787.5,51450 ; K8.1@54750,51412.5 54787.5,51450 ; K8.1@54762,51403.5 54787.5,51450 ; K4.1@54763.05,51505.21 54787.5,51560 ; K4.4@54763.05,51744.79 54787.5,51690 ; K4.1@54763.29,51493.75 54787.5,51450 ; K8.1@54771.35,51399.49 54787.5,51450 ; K4.1@54772.62,51501.88 54787.5,51560 ; K4.4@54772.62,51748.12 54787.5,51690 ; K4.1@54772.67,51497.75 54787.5,51450 ; K4.4@54787.5,51750 K4.1@54787.5,51500 54787.5,51450 ; K4.1@54802.33,51497.75 54787.5,51450 ; K4.1@54802.38,51501.88 54787.5,51560 ; K4.4@54802.38,51748.12 54787.5,51690 ; K4.1@54811.71,51493.75 54787.5,51450 ; K4.1@54811.95,51505.21 54787.5,51560 ; K4.4@54811.95,51744.79 54787.5,51690
  TopLayer w30: R25.4@55500,51850 R25.2@55600,51850
  BottomLayer w10: K8.1@54750,51412.5 K8.4@55000,51412.5 ; K8.1@54751.88,51397.62 54810,51412.5 ; K8.1@54751.88,51427.38 54810,51412.5 ; K8.1@54755.21,51388.05 54810,51412.5 ; K8.1@54755.21,51436.95 54810,51412.5 ; K4.4@54773.23,51729.48 54837.5,51700 ; K4.4@54778.08,51738.33 54837.5,51700 ; K4.4@54787.5,51750 54837.5,51700 ; K4.4@54799.17,51759.42 54837.5,51700 ; K4.4@54808.02,51764.27 54837.5,51700 ; K8.4@54994.79,51388.05 54940,51412.5 ; K8.4@54994.79,51436.95 54940,51412.5 ; K8.4@54998.12,51397.62 54940,51412.5 ; K8.4@54998.12,51427.38 54940,51412.5 ; R25.2@55580.33,51846.36 55600,51795 ; R25.2@55590.04,51849.09 55600,51795 ; R25.2@55600,51850 55600,51725 55575,51700 54837.5,51700 ; R25.2@55609.96,51849.09 55600,51795 ; R25.2@55619.67,51846.36 55600,51795
NetP1_2: P1.2 U4.8 | length 365
  BottomLayer w30: U4.8@51850,51200 P1.2@51850,51450 ; U4.8@51850,51215 51850,51330
P00: J1.1 U1.1 | length 704.1
  BottomLayer w10: J1.1@52300,52000 U1.1@52400,52000 ; J1.1@52301.77,51985.58 52359.53,52000 ; J1.1@52301.77,52014.42 52359.53,52000 ; J1.1@52305.05,51976 52359.53,52000 ; J1.1@52305.05,52024 52359.53,52000 ; U1.1@52394.46,51974.6 52339,52000 ; U1.1@52394.46,52025.4 52339,52000 ; U1.1@52397.9,51984.14 52339,52000 ; U1.1@52397.9,52015.86 52339,52000 ; U1.1@52399.7,51994.01 52339,52000 ; U1.1@52399.7,52005.99 52339,52000
P01: J1.2 U1.2 | length 704.1
  BottomLayer w10: J1.2@52300,51900 U1.2@52400,51900 ; J1.2@52301.77,51885.58 52359.53,51900 ; J1.2@52301.77,51914.42 52359.53,51900 ; J1.2@52305.05,51876 52359.53,51900 ; J1.2@52305.05,51924 52359.53,51900 ; U1.2@52394.46,51874.6 52339,51900 ; U1.2@52394.46,51925.4 52339,51900 ; U1.2@52397.9,51884.14 52339,51900 ; U1.2@52397.9,51915.86 52339,51900 ; U1.2@52399.7,51894.01 52339,51900 ; U1.2@52399.7,51905.99 52339,51900
P02: J1.3 U1.3 | length 704.1
  BottomLayer w10: J1.3@52300,51800 U1.3@52400,51800 ; J1.3@52301.77,51785.58 52359.53,51800 ; J1.3@52301.77,51814.42 52359.53,51800 ; J1.3@52305.05,51776 52359.53,51800 ; J1.3@52305.05,51824 52359.53,51800 ; U1.3@52394.46,51774.6 52339,51800 ; U1.3@52394.46,51825.4 52339,51800 ; U1.3@52397.9,51784.14 52339,51800 ; U1.3@52397.9,51815.86 52339,51800 ; U1.3@52399.7,51794.01 52339,51800 ; U1.3@52399.7,51805.99 52339,51800
P03: J1.4 U1.4 | length 704.1
  BottomLayer w10: J1.4@52300,51700 U1.4@52400,51700 ; J1.4@52301.77,51685.58 52359.53,51700 ; J1.4@52301.77,51714.42 52359.53,51700 ; J1.4@52305.05,51676 52359.53,51700 ; J1.4@52305.05,51724 52359.53,51700 ; U1.4@52394.46,51674.6 52339,51700 ; U1.4@52394.46,51725.4 52339,51700 ; U1.4@52397.9,51684.14 52339,51700 ; U1.4@52397.9,51715.86 52339,51700 ; U1.4@52399.7,51694.01 52339,51700 ; U1.4@52399.7,51705.99 52339,51700
P04: J1.5 U1.5 | length 1011.1
  BottomLayer w20: J1.5@52300,51600 U1.5@52400,51600 ; J1.5@52302.13,51580.59 52389.53,51600 J1.5@52302.13,51619.41 ; U1.5@52393.62,51579.99 J1.5@52310.04,51617.65 ; U1.5@52393.62,51620.01 J1.5@52310.04,51582.35 ; U1.5@52397.58,51579.14 52309,51600 U1.5@52397.58,51620.86 ; U1.5@52401.66,51579.07 J1.5@52310.04,51582.35 ; U1.5@52401.66,51620.93 J1.5@52310.04,51617.65 ; J1.5@52310.04,51582.35 U1.5@52400,51600 ; J1.5@52310.04,51617.65 U1.5@52400,51600
P05: J1.6 U1.6 | length 1011.1
  BottomLayer w20: J1.6@52300,51500 U1.6@52400,51500 ; J1.6@52302.13,51480.59 52389.53,51500 J1.6@52302.13,51519.41 ; U1.6@52393.62,51479.99 J1.6@52310.04,51517.65 ; U1.6@52393.62,51520.01 J1.6@52310.04,51482.35 ; U1.6@52397.58,51479.14 52309,51500 U1.6@52397.58,51520.86 ; U1.6@52401.66,51479.07 J1.6@52310.04,51482.35 ; U1.6@52401.66,51520.93 J1.6@52310.04,51517.65 ; J1.6@52310.04,51482.35 U1.6@52400,51500 ; J1.6@52310.04,51517.65 U1.6@52400,51500
P06: J1.7 U1.7 | length 704.1
  BottomLayer w10: J1.7@52300,51400 U1.7@52400,51400 ; J1.7@52301.77,51385.58 52359.53,51400 ; J1.7@52301.77,51414.42 52359.53,51400 ; J1.7@52305.05,51376 52359.53,51400 ; J1.7@52305.05,51424 52359.53,51400 ; U1.7@52394.46,51374.6 52339,51400 ; U1.7@52394.46,51425.4 52339,51400 ; U1.7@52397.9,51384.14 52339,51400 ; U1.7@52397.9,51415.86 52339,51400 ; U1.7@52399.7,51394.01 52339,51400 ; U1.7@52399.7,51405.99 52339,51400
P07: J1.8 U1.8 | length 704.1
  BottomLayer w10: J1.8@52300,51300 U1.8@52400,51300 ; J1.8@52301.77,51285.58 52359.53,51300 ; J1.8@52301.77,51314.42 52359.53,51300 ; J1.8@52305.05,51276 52359.53,51300 ; J1.8@52305.05,51324 52359.53,51300 ; U1.8@52394.46,51274.6 52339,51300 ; U1.8@52394.46,51325.4 52339,51300 ; U1.8@52397.9,51284.14 52339,51300 ; U1.8@52397.9,51315.86 52339,51300 ; U1.8@52399.7,51294.01 52339,51300 ; U1.8@52399.7,51305.99 52339,51300
P10: J1.9 R1.2 R1.4 U1.9 U4.5 | length 1969.4
  TopLayer w30: R1.2@52200,51300 R1.4@52200,51400
  BottomLayer w10: U4.5@52130.83,51220.71 52150,51250 ; U4.5@52140.1,51216.43 52150,51250 ; U4.5@52150,51215 52150,51250 ; U4.5@52150.91,51190.04 52205,51200 ; U4.5@52150.91,51209.96 52205,51200 ; U4.5@52153.64,51180.33 52205,51200 ; U4.5@52153.64,51219.67 52205,51200 ; U4.5@52159.9,51216.43 52150,51250 ; U4.5@52169.17,51220.71 52150,51250 ; R1.2@52183.86,51311.81 52153.79,51253.79 ; R1.2@52192.41,51306.51 52153.79,51253.79 ; R1.2@52200,51300 52150,51250 ; R1.2@52206.51,51292.41 52153.79,51253.79 ; R1.2@52211.81,51283.86 52153.79,51253.79 ; J1.9@52294.95,51176 52240.47,51200 ; J1.9@52294.95,51224 52240.47,51200 ; J1.9@52298.23,51185.58 52240.47,51200 ; J1.9@52298.23,51214.42 52240.47,51200 ; J1.9@52301.77,51185.58 52359.53,51200 ; J1.9@52301.77,51214.42 52359.53,51200 ; J1.9@52305.05,51176 52359.53,51200 ; J1.9@52305.05,51224 52359.53,51200 ; U1.9@52394.46,51174.6 52339,51200 ; U1.9@52394.46,51225.4 52339,51200 ; U1.9@52397.9,51184.14 52339,51200 ; U1.9@52397.9,51215.86 52339,51200 ; U1.9@52399.7,51194.01 52339,51200 ; U1.9@52399.7,51205.99 52339,51200 ; U1.9@52400,51200 J1.9@52300,51200 U4.5@52150,51200 52150,51250
P11: J1.10 R3.2 R3.4 U1.10 U4.6 | length 2209.7
  TopLayer w30: R3.2@52100,51300 R3.4@52100,51400
  BottomLayer w10: U4.6@52030.33,51181.36 52050,51130 ; U4.6@52030.83,51220.71 52050,51250 ; U4.6@52040.04,51184.09 52050,51130 ; U4.6@52040.1,51216.43 52050,51250 ; U4.6@52050,51185 52050,51130 ; U4.6@52050,51215 52050,51250 ; U4.6@52059.9,51216.43 52050,51250 ; U4.6@52059.96,51184.09 52050,51130 ; U4.6@52069.17,51220.71 52050,51250 ; U4.6@52069.67,51181.36 52050,51130 ; R3.2@52083.86,51311.81 52053.79,51253.79 ; R3.2@52092.41,51306.51 52053.79,51253.79 ; R3.2@52100,51300 52050,51250 ; R3.2@52106.51,51292.41 52053.79,51253.79 ; R3.2@52111.81,51283.86 52053.79,51253.79 ; J1.10@52294.95,51076 52240.47,51100 ; J1.10@52294.95,51124 52240.47,51100 ; J1.10@52298.23,51085.58 52240.47,51100 ; J1.10@52298.23,51114.42 52240.47,51100 ; J1.10@52301.77,51085.58 52359.53,51100 ; J1.10@52301.77,51114.42 52359.53,51100 ; J1.10@52305.05,51076 52359.53,51100 ; J1.10@52305.05,51124 52359.53,51100 ; U1.10@52394.46,51074.6 52339,51100 ; U1.10@52394.46,51125.4 52339,51100 ; U1.10@52397.9,51084.14 52339,51100 ; U1.10@52397.9,51115.86 52339,51100 ; U1.10@52399.7,51094.01 52339,51100 ; U1.10@52399.7,51105.99 52339,51100 ; U1.10@52400,51100 J1.10@52300,51100 52075,51100 52050,51125 U4.6@52050,51200 52050,51250